# Altium PCB wheel.pcbdoc
Units mil, origin at the board's own origin, x right, y up, seen from the top; angles counter-clockwise.
Board outline 3149.6 x 3149.71 mil, 2 copper layers (Top Layer, Bottom Layer); 3 components, 1 nets, 0 pads, 0 vias.
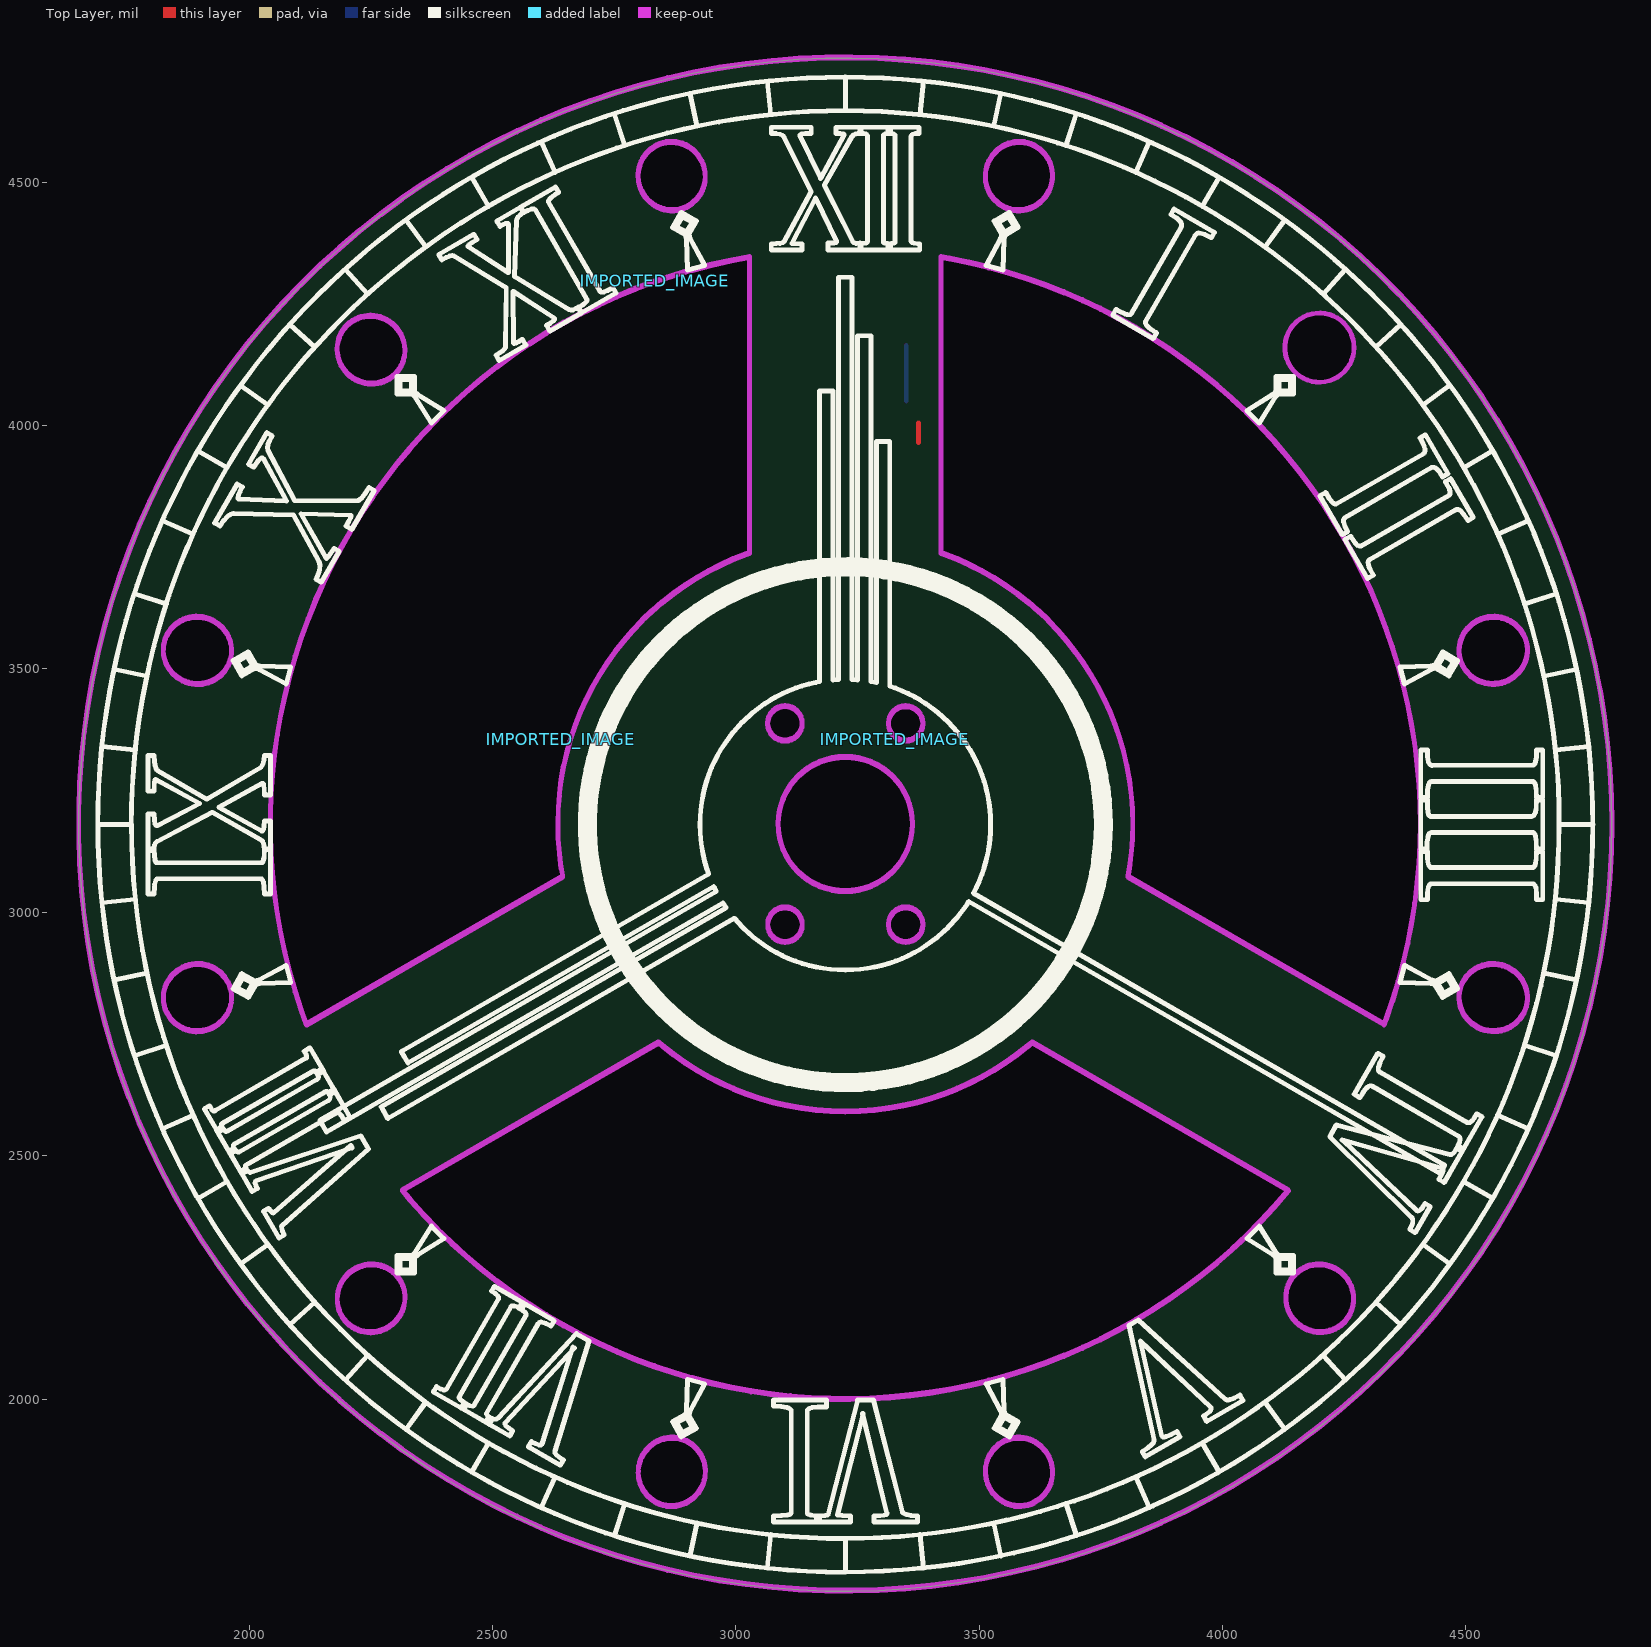
[diagram p0: Top Layer view]
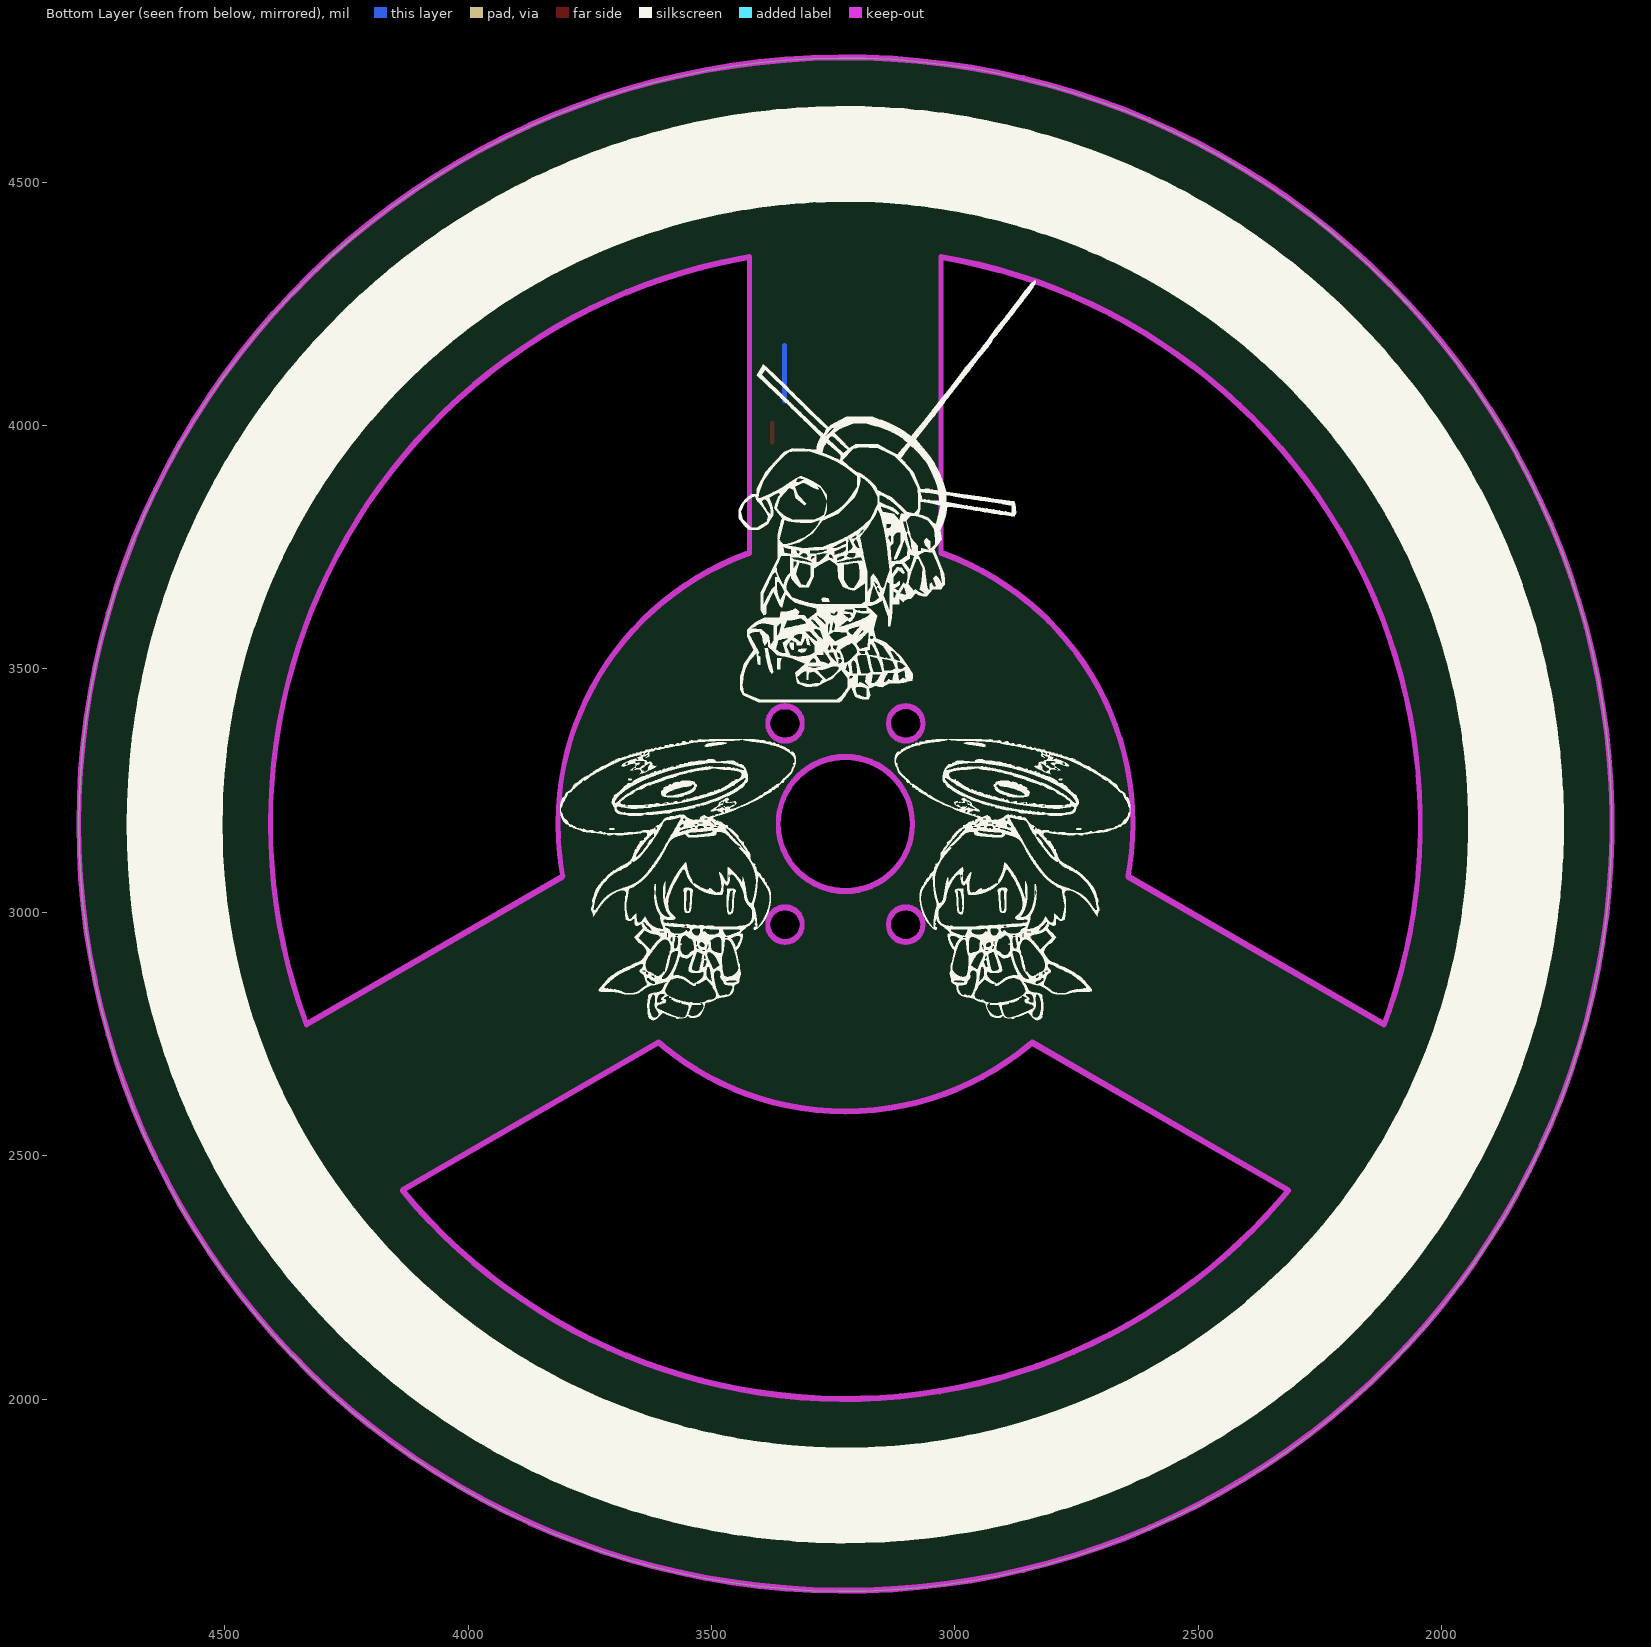
[diagram p1: Bottom Layer view, seen from below]

## Layer stack, top to bottom
Top Solder: solder mask 0.4, Solder Resist, Dk 3.5
Top Layer: signal copper 1.4
Dielectric1: dielectric 12.6, FR-4, Dk 4.8
Bottom Layer: signal copper 1.4
Bottom Solder: solder mask 0.4, Solder Resist, Dk 3.5

## Board outline
1931.74,2281.02 1901.32,2326.44 1872.49,2372.89 1845.3,2420.31 1819.76,2468.65 1795.92,2517.84 1773.8,2567.83 1753.42,2618.56 1734.83,2669.97 1718.03,2722 1703.04,2774.57 1689.88,2827.63 1678.58,2881.12 1669.14,2934.97 1661.57,2989.11 1655.89,3043.48 1652.1,3098.02 1650.2,3152.65 1650.2,3207.32 1652.1,3261.96 1655.89,3316.5 1661.57,3370.87 1669.14,3425.01 1678.58,3478.86 1689.88,3532.34 1703.04,3585.41 1718.03,3637.98 1734.83,3690.01 1753.42,3741.41 1773.79,3792.14 1795.92,3842.14 1819.76,3891.33 1845.29,3939.67 1872.49,3987.09 1901.32,4033.55 1931.74,4078.97 1963.72,4123.31 1997.21,4166.51 2032.19,4208.52 2068.61,4249.3 2106.42,4288.78 2145.58,4326.94 2186.03,4363.7 2227.74,4399.05 2270.65,4432.92 2314.71,4465.28 2359.87,4496.1 2406.06,4525.32 2453.25,4552.93 2501.36,4578.89 2550.35,4603.15 2600.15,4625.71 2650.71,4646.52 2701.95,4665.56 2753.82,4682.82 2806.26,4698.26 2859.21,4711.88 2912.6,4723.65 2966.36,4733.55 3020.44,4741.59 3074.76,4747.74 3129.26,4752.01 3183.88,4754.38 3238.55,4754.85 3293.2,4753.43 3347.76,4750.11 3402.18,4744.9 3456.39,4737.81 3510.32,4728.83 3563.9,4718 3617.07,4705.3 3669.78,4690.77 3721.94,4674.42 3773.51,4656.27 3824.41,4636.34 3874.6,4614.65 3924,4591.24 3972.56,4566.12 4020.22,4539.34 4066.91,4510.92 4112.6,4480.89 4157.21,4449.3 4200.71,4416.17 4243.03,4381.56 4284.11,4345.5 4323.93,4308.04 4362.42,4269.22 4399.53,4229.07 4435.23,4187.68 4469.47,4145.06 4502.22,4101.28 4533.43,4056.4 4563.06,4010.45 4591.07,3963.51 4617.45,3915.62 4642.13,3866.85 4665.12,3817.25 4686.37,3766.87 4705.86,3715.8 4723.56,3664.07 4739.46,3611.77 4753.53,3558.94 4765.77,3505.66 4776.14,3451.99 4784.64,3397.98 4791.27,3343.72 4796.01,3289.25 4798.86,3234.66 4799.8,3180 4798.86,3125.34 4796.01,3070.74 4791.27,3016.28 4784.64,2962.01 4776.14,2908.01 4765.76,2854.34 4753.53,2801.05 4739.46,2748.23 4723.56,2695.92 4705.86,2644.2 4686.37,2593.12 4665.12,2542.75 4642.14,2493.15 4617.45,2444.38 4591.07,2396.49 4563.06,2349.55 4533.43,2303.61 4502.23,2258.72 4469.48,2214.94 4435.24,2172.33 4399.54,2130.93 4362.42,2090.79 4323.93,2051.97 4284.12,2014.5 4243.03,1978.44 4200.71,1943.83 4157.22,1910.71 4112.61,1879.12 4066.92,1849.09 4020.22,1820.67 3972.57,1793.88 3924.01,1768.77 3874.61,1745.35 3824.42,1723.67 3773.52,1703.74 3721.95,1685.59 3669.78,1669.24 3617.08,1654.7 3563.91,1642.01 3510.32,1631.17 3456.4,1622.2 3402.19,1615.1 3347.77,1609.89 3293.2,1606.57 3238.55,1605.15 3183.89,1605.62 3129.27,1607.99 3074.77,1612.26 3020.44,1618.41 2966.37,1626.45 2912.61,1636.36 2859.22,1648.12 2806.27,1661.74 2753.83,1677.18 2701.96,1694.43 2650.72,1713.48 2600.16,1734.29 2550.36,1756.84 2501.37,1781.11 2453.26,1807.06 2406.07,1834.67 2359.87,1863.9 2314.72,1894.71 2270.66,1927.08 2227.75,1960.95 2186.04,1996.29 2145.58,2033.06 2106.42,2071.21 2068.61,2110.7 2032.2,2151.47 1997.22,2193.48 1963.72,2236.68
cut-out: 4127.87,4160 ccw(c4198.94,4160) 4198.94,4088.94 ccw(c4198.94,4160) 4270,4160 ccw(c4198.94,4160) 4198.94,4231.06 ccw(c4198.94,4160)
cut-out: 2682.24,2130.83 2718.98,2112.62 2756.33,2095.71 2794.24,2080.11 2832.67,2065.82 2871.58,2052.88 2910.92,2041.3 2950.62,2031.09 2990.66,2022.27 3030.99,2014.84 3071.54,2008.81 3112.28,2004.19 3153.16,2001 3194.12,1999.22 3235.12,1998.86 3276.11,1999.93 3317.03,2002.42 3357.85,2006.32 3398.51,2011.65 3438.95,2018.38 3479.14,2026.51 3519.02,2036.03 3558.55,2046.92 3597.67,2059.19 3636.34,2072.8 3674.53,2087.75 3712.16,2104.01 3749.21,2121.57 3785.64,2140.41 3821.38,2160.49 3856.4,2181.81 3890.66,2204.33 3924.13,2228.03 3956.74,2252.87 3988.48,2278.82 4019.3,2305.87 4049.16,2333.97 4078.02,2363.09 4105.86,2393.19 4135.08,2427.28 3608.52,2731.28 3600.49,2724.32 3578.23,2706.83 3555.06,2690.32 3531.07,2674.95 3506.33,2660.83 3480.93,2647.76 3454.7,2635.97 3427.87,2625.32 3400.45,2616.03 3372.46,2608.1 3343.89,2601.53 3314.87,2596.34 3285.27,2592.52 3255.24,2590.31 3224.91,2589.53 3194.57,2590.34 3164.5,2592.58 3134.96,2596.34 3105.9,2601.52 3077.33,2608.13 3049.32,2616.12 3021.83,2625.4 2995.08,2635.95 2968.85,2647.8 2943.39,2660.79 2918.67,2675.07 2894.68,2690.4 2871.55,2706.82 2849.27,2724.34 2841.38,2731.2 2314.86,2427.2 2330.36,2408.59 2357.67,2378.01 2386.03,2348.4 2415.39,2319.78 2445.74,2292.21 2477.02,2265.7 2509.2,2240.3 2542.25,2216.03 2576.12,2192.92 2610.76,2171 2646.15,2150.29
cut-out: 3744.13,3461.5 3729.87,3486.21 3714.51,3510.2 3698.08,3533.32 3680.5,3555.63 3662,3577.11 3642.46,3597.59 3621.93,3617.17 3600.47,3635.71 3578.2,3653.22 3555.06,3669.65 3531.12,3685.06 3506.34,3699.25 3480.89,3712.24 3454.79,3724.13 3427.91,3734.65 3421.85,3736.72 3421.85,4344.47 3438.95,4341.62 3479.13,4333.49 3519.01,4323.97 3558.54,4313.07 3597.66,4300.81 3636.34,4287.19 3674.52,4272.25 3712.16,4255.99 3749.21,4238.42 3785.63,4219.59 3821.37,4199.5 3856.39,4178.18 3890.66,4155.66 3924.12,4131.97 3956.73,4107.13 3988.48,4081.17 4019.29,4054.12 4049.15,4026.02 4078.02,3996.91 4105.85,3966.8 4132.63,3935.75 4158.31,3903.79 4182.88,3870.96 4206.28,3837.3 4228.5,3802.84 4249.51,3767.63 4269.29,3731.71 4287.8,3695.13 4305.04,3657.93 4320.99,3620.15 4335.6,3581.84 4348.88,3543.05 4360.8,3503.82 4371.36,3464.2 4380.53,3424.24 4388.31,3383.99 4394.69,3343.48 4399.66,3302.78 4403.21,3261.94 4405.34,3220.99 4406.06,3179.99 4405.35,3139 4403.21,3098.05 4399.66,3057.2 4394.69,3016.51 4388.31,2976.01 4380.53,2935.75 4371.36,2895.79 4360.8,2856.17 4348.88,2816.94 4335.6,2778.15 4331.84,2768.28 3805.41,3072.21 3808.62,3090.13 3812.38,3119.67 3814.66,3149.6 3815.38,3179.99 3814.65,3210.41 3812.3,3240.41 3808.57,3269.96 3803.38,3298.98 3796.81,3327.55 3788.79,3355.59 3779.55,3383.09 3768.99,3409.87 3757.15,3436.02
cut-out: 2045.28,3118.51 2043.86,3159.49 2043.86,3200.49 2045.28,3241.47 2048.12,3282.37 2052.39,3323.15 2058.06,3363.76 2065.14,3404.14 2073.62,3444.26 2083.48,3484.05 2094.72,3523.48 2107.32,3562.5 2121.28,3601.06 2136.55,3639.11 2153.14,3676.6 2171.03,3713.5 2190.18,3749.75 2210.58,3785.32 2232.2,3820.15 2255.01,3854.22 2278.99,3887.48 2304.12,3919.88 2330.35,3951.39 2357.66,3981.97 2386.02,4011.59 2415.39,4040.2 2445.73,4067.77 2477.01,4094.28 2509.2,4119.69 2542.24,4143.96 2576.11,4167.07 2610.76,4188.99 2646.15,4209.69 2682.23,4229.16 2718.97,4247.36 2756.33,4264.28 2794.24,4279.89 2832.67,4294.17 2871.57,4307.11 2910.91,4318.69 2950.62,4328.9 2990.66,4337.73 3028.15,4344.64 3028.15,3736.91 3021.79,3734.77 2994.96,3724.12 2968.8,3712.29 2943.33,3699.26 2918.66,3685.09 2894.68,3669.73 2871.51,3653.22 2849.25,3635.72 2827.85,3617.17 2807.23,3597.59 2787.79,3577.11 2769.17,3555.69 2751.65,3533.42 2735.18,3510.19 2719.85,3486.2 2705.62,3461.57 2692.58,3436.02 2680.78,3409.88 2670.18,3383.04 2660.95,3355.64 2652.96,3327.63 2646.35,3299.06 2641.17,3270 2637.41,3240.46 2635.21,3210.48 2634.36,3180.06 2635.09,3149.63 2637.43,3119.63 2641.17,3090.09 2644.39,3072.06 2117.95,2768.12 2107.33,2797.48 2094.73,2836.49 2083.48,2875.93 2073.62,2915.72 2065.14,2955.84 2058.06,2996.22 2052.39,3036.83 2048.12,3077.61
cut-out: 3518.67,4481.65 3516.21,4487.85 3514.44,4494.35 3513.16,4501.04 3512.57,4507.93 3512.77,4514.82 3513.56,4521.9 3515.03,4528.89 3517.2,4535.78 3520.05,4542.18 3527.34,4553.89 3536.59,4563.83 3547.41,4571.71 3553.32,4574.86 3559.52,4577.32 3565.92,4579.29 3572.41,4580.57 3579.2,4581.26 3586,4581.16 3592.89,4580.47 3599.78,4578.99 3606.47,4576.83 3612.87,4573.97 3624.28,4566.69 3633.93,4557.44 3641.51,4546.51 3644.56,4540.51 3647.02,4534.31 3648.79,4527.81 3649.97,4521.12 3650.57,4514.23 3650.46,4507.34 3649.68,4500.25 3648.1,4493.26 3645.94,4486.37 3643.09,4479.98 3635.8,4468.26 3626.55,4458.32 3615.72,4450.45 3609.91,4447.3 3603.72,4444.84 3597.31,4442.87 3590.72,4441.59 3584.03,4440.9 3577.14,4441 3570.25,4441.69 3563.36,4443.16 3556.66,4445.33 3550.37,4448.18 3538.95,4455.47 3529.3,4464.72 3521.63,4475.65
cut-out: 2803.91,4486.37 2801.75,4493.26 2800.27,4500.25 2799.48,4507.34 2799.28,4514.23 2799.88,4521.12 2801.16,4527.81 2802.93,4534.31 2805.39,4540.51 2808.34,4546.51 2816.02,4557.44 2825.66,4566.69 2837.08,4573.97 2843.38,4576.83 2850.07,4578.99 2856.96,4580.47 2863.85,4581.16 2870.74,4581.26 2877.43,4580.57 2884.03,4579.29 2890.43,4577.32 2896.63,4574.86 2902.43,4571.71 2913.26,4563.83 2922.51,4553.89 2929.8,4542.18 2932.65,4535.78 2934.82,4528.89 2936.29,4521.9 2937.08,4514.82 2937.28,4507.93 2936.69,4501.04 2935.41,4494.35 2933.64,4487.85 2931.17,4481.65 2928.22,4475.65 2920.54,4464.72 2910.9,4455.47 2899.48,4448.18 2893.18,4445.33 2886.49,4443.16 2879.6,4441.69 2872.71,4441 2865.92,4440.9 2859.13,4441.59 2852.63,4442.87 2846.23,4444.84 2840.03,4447.3 2834.13,4450.45 2823.3,4458.32 2814.05,4468.26 2806.76,4479.98
cut-out: 2192.89,4116.69 2189.25,4122.6 2186.39,4128.79 2184.13,4135.19 2182.45,4141.79 2181.37,4148.38 2180.98,4155.07 2181.27,4161.77 2182.16,4168.36 2183.64,4174.86 2185.8,4181.16 2188.66,4187.36 2192.1,4193.26 2196.14,4198.87 2200.86,4204.09 2206.08,4208.81 2211.69,4212.85 2217.59,4216.29 2223.79,4219.15 2230.09,4221.31 2236.59,4222.79 2243.18,4223.68 2249.88,4223.97 2256.57,4223.58 2263.16,4222.59 2269.76,4220.92 2276.16,4218.66 2282.36,4215.7 2288.26,4212.16 2293.97,4207.93 2299.28,4203.1 2304.11,4197.79 2308.34,4192.08 2311.88,4186.18 2314.84,4179.88 2317.1,4173.48 2318.77,4166.98 2319.76,4160.39 2320.15,4153.7 2319.95,4147 2319.07,4140.41 2317.49,4133.91 2315.33,4127.52 2312.57,4121.41 2309.13,4115.51 2304.99,4109.9 2300.27,4104.68 2295.05,4099.96 2289.44,4095.82 2283.53,4092.38 2277.43,4089.62 2271.03,4087.46 2264.54,4085.88 2257.95,4084.99 2251.25,4084.8 2244.56,4085.19 2237.97,4086.18 2231.47,4087.85 2225.07,4090.11 2218.77,4093.07 2212.87,4096.61 2207.16,4100.84 2201.84,4105.66 2197.02,4110.98
cut-out: 1830.19,3508.32 1827.73,3514.52 1825.76,3520.92 1824.48,3527.42 1823.79,3534.21 1823.89,3541 1824.58,3547.89 1826.06,3554.78 1828.22,3561.47 1831.08,3567.87 1838.36,3579.29 1847.61,3588.93 1858.54,3596.61 1864.54,3599.56 1870.74,3602.02 1877.24,3603.79 1883.93,3605.07 1890.82,3605.66 1897.71,3605.47 1904.8,3604.68 1911.79,3603.2 1918.67,3600.94 1925.07,3598.18 1936.79,3590.8 1946.73,3581.65 1954.6,3570.82 1957.75,3564.92 1960.21,3558.72 1962.18,3552.32 1963.46,3545.72 1964.15,3539.03 1964.05,3532.24 1963.36,3525.35 1961.88,3518.46 1959.72,3511.77 1956.86,3505.37 1949.58,3493.95 1940.33,3484.31 1929.4,3476.73 1923.4,3473.68 1917.2,3471.22 1910.7,3469.44 1904.01,3468.16 1897.12,3467.57 1890.23,3467.77 1883.14,3468.56 1876.15,3470.03 1869.27,3472.2 1862.87,3475.05 1851.15,3482.34 1841.21,3491.59 1833.34,3502.42
cut-out: 1828.32,2798.48 1826.15,2805.17 1824.68,2812.06 1823.89,2818.95 1823.89,2825.74 1824.58,2832.44 1825.86,2839.03 1827.73,2845.43 1830.29,2851.63 1833.44,2857.53 1841.21,2868.36 1851.15,2877.51 1862.87,2884.9 1869.27,2887.65 1876.15,2889.92 1883.14,2891.39 1890.23,2892.18 1897.12,2892.38 1904.01,2891.79 1910.7,2890.51 1917.2,2888.74 1923.4,2886.27 1929.4,2883.32 1940.33,2875.64 1949.68,2866 1956.96,2854.58 1959.82,2848.18 1961.98,2841.49 1963.46,2834.6 1964.15,2827.71 1964.25,2820.92 1963.56,2814.13 1962.28,2807.63 1960.31,2801.24 1957.85,2795.03 1954.7,2789.13 1946.82,2778.3 1936.88,2769.05 1925.17,2761.77 1918.77,2758.91 1911.88,2756.75 1904.89,2755.27 1897.81,2754.48 1890.92,2754.29 1884.03,2754.88 1877.33,2756.16 1870.84,2757.93 1864.64,2760.39 1858.63,2763.44 1847.71,2771.02 1838.46,2780.66 1831.17,2792.08
cut-out: 2192.2,2166.69 2188.75,2172.59 2185.9,2178.79 2183.73,2185.09 2182.26,2191.59 2181.37,2198.18 2181.17,2204.88 2181.47,2211.57 2182.55,2218.16 2184.23,2224.76 2186.49,2231.16 2189.44,2237.36 2192.99,2243.26 2197.22,2248.97 2202.04,2254.29 2207.36,2259.11 2213.06,2263.34 2218.97,2266.89 2225.17,2269.84 2231.57,2272.1 2238.06,2273.77 2244.76,2274.86 2251.45,2275.25 2258.04,2274.96 2264.64,2274.07 2271.23,2272.59 2277.53,2270.43 2283.73,2267.57 2289.64,2264.13 2295.25,2260.09 2300.46,2255.37 2305.19,2250.15 2309.23,2244.54 2312.67,2238.64 2315.53,2232.44 2317.69,2226.14 2319.16,2219.54 2320.05,2212.95 2320.35,2206.26 2319.95,2199.66 2318.87,2192.97 2317.2,2186.47 2314.93,2180.07 2311.98,2173.87 2308.44,2167.87 2304.2,2162.16 2299.38,2156.85 2294.07,2152.02 2288.36,2147.89 2282.45,2144.25 2276.25,2141.39 2269.86,2139.13 2263.36,2137.46 2256.66,2136.37 2250.07,2135.98 2243.38,2136.27 2236.78,2137.16 2230.19,2138.64 2223.89,2140.8 2217.69,2143.66 2211.78,2147.1 2206.17,2151.14 2200.96,2155.86 2196.23,2161.08
cut-out: 2805.58,1819.64 2803.12,1825.84 2801.35,1832.34 2800.07,1839.03 2799.48,1845.92 2799.68,1852.81 2800.46,1859.9 2801.94,1866.88 2804.11,1873.77 2806.96,1880.17 2814.25,1891.88 2823.5,1901.83 2834.23,1909.6 2840.13,1912.75 2846.33,1915.31 2852.73,1917.18 2859.32,1918.46 2866.02,1919.15 2872.91,1919.15 2879.8,1918.36 2886.69,1916.88 2893.38,1914.72 2899.68,1911.87 2911.1,1904.58 2920.74,1895.33 2928.42,1884.4 2931.37,1878.4 2933.83,1872.2 2935.6,1865.7 2936.88,1859.01 2937.47,1852.12 2937.28,1845.23 2936.49,1838.14 2935.01,1831.16 2932.85,1824.27 2929.99,1817.87 2922.71,1806.16 2913.46,1796.22 2902.63,1788.34 2896.73,1785.19 2890.53,1782.73 2884.13,1780.76 2877.63,1779.48 2870.84,1778.79 2864.05,1778.89 2857.16,1779.58 2850.27,1781.06 2843.57,1783.22 2837.28,1786.08 2825.86,1793.36 2816.21,1802.71 2808.53,1813.64
cut-out: 3517.39,1824.37 3515.23,1831.26 3513.75,1838.24 3512.87,1845.33 3512.77,1852.22 3513.36,1859.11 3514.54,1865.8 3516.41,1872.3 3518.87,1878.5 3521.82,1884.5 3529.4,1895.43 3539.05,1904.68 3550.46,1911.96 3556.86,1914.82 3563.56,1916.98 3570.45,1918.46 3577.33,1919.15 3584.13,1919.25 3590.92,1918.56 3597.41,1917.28 3603.81,1915.31 3610.01,1912.85 3615.92,1909.7 3626.74,1901.83 3636,1891.88 3643.28,1880.17 3646.13,1873.77 3648.3,1866.88 3649.78,1859.9 3650.57,1852.81 3650.76,1845.92 3650.17,1839.03 3648.89,1832.34 3647.12,1825.84 3644.66,1819.64 3641.7,1813.64 3634.03,1802.71 3624.39,1793.46 3612.96,1786.18 3606.66,1783.32 3599.97,1781.15 3593.09,1779.68 3586.2,1778.99 3579.3,1778.89 3572.61,1779.58 3566.02,1780.86 3559.62,1782.83 3553.42,1785.29 3547.51,1788.44 3536.78,1796.31 3527.53,1806.26 3520.25,1817.97
cut-out: 4138.16,2173.97 4141.7,2168.07 4145.94,2162.36 4150.76,2157.04 4156.07,2152.22 4161.78,2147.99 4167.69,2144.44 4173.89,2141.49 4180.29,2139.23 4186.88,2137.55 4193.48,2136.57 4200.17,2136.18 4206.86,2136.37 4213.46,2137.26 4219.96,2138.83 4226.25,2141 4232.45,2143.76 4238.36,2147.2 4243.97,2151.33 4249.19,2156.06 4253.91,2161.27 4257.94,2166.89 4261.39,2172.79 4264.24,2178.89 4266.41,2185.29 4267.89,2191.79 4268.77,2198.38 4269.07,2205.07 4268.67,2211.77 4267.69,2218.36 4266.02,2224.86 4263.76,2231.26 4260.8,2237.55 4257.26,2243.46 4253.02,2249.17 4248.2,2254.48 4242.89,2259.31 4237.18,2263.44 4231.27,2267.08 4224.97,2269.94 4218.57,2272.2 4212.08,2273.87 4205.48,2274.96 4198.79,2275.35 4192.1,2275.05 4185.5,2274.17 4179.01,2272.69 4172.61,2270.53 4166.51,2267.67 4160.6,2264.23 4154.99,2260.19 4149.77,2255.47 4145.05,2250.25 4140.92,2244.64 4137.47,2238.74 4134.72,2232.53 4132.55,2226.24 4130.98,2219.74 4130.09,2213.14 4129.89,2206.45 4130.29,2199.76 4131.27,2193.16 4132.94,2186.57 4135.21,2180.17
cut-out: 4492.3,2795.13 4489.83,2801.33 4487.87,2807.73 4486.59,2814.33 4485.9,2821.02 4486,2827.91 4486.69,2834.8 4488.16,2841.69 4490.33,2848.38 4493.18,2854.68 4500.46,2866.1 4509.72,2875.74 4520.65,2883.42 4526.65,2886.37 4532.85,2888.83 4539.35,2890.61 4546.03,2891.89 4552.93,2892.48 4559.81,2892.28 4566.9,2891.49 4573.89,2890.01 4580.78,2887.85 4587.18,2884.99 4598.89,2877.71 4608.83,2868.46 4616.7,2857.63 4619.85,2851.73 4622.31,2845.53 4624.28,2839.13 4625.57,2832.63 4626.26,2825.84 4626.15,2819.05 4625.46,2812.16 4623.99,2805.27 4621.82,2798.58 4618.97,2792.28 4611.69,2780.86 4602.43,2771.22 4591.51,2763.54 4585.5,2760.59 4579.3,2758.12 4572.81,2756.35 4566.11,2755.07 4559.22,2754.48 4552.33,2754.68 4545.25,2755.47 4538.26,2756.94 4531.37,2759.11 4524.97,2761.96 4513.26,2769.25 4503.32,2778.5 4495.44,2789.23
cut-out: 4490.23,3511.86 4488.07,3518.56 4486.59,3525.45 4485.9,3532.34 4485.8,3539.13 4486.49,3545.92 4487.77,3552.42 4489.74,3558.81 4492.2,3565.01 4495.35,3570.92 4503.22,3581.75 4513.16,3591 4524.87,3598.28 4531.27,3601.14 4538.16,3603.3 4545.15,3604.78 4552.24,3605.57 4559.13,3605.76 4566.02,3605.17 4572.71,3603.89 4579.2,3602.12 4585.4,3599.66 4591.41,3596.71 4602.33,3589.03 4611.59,3579.39 4618.87,3567.97 4621.72,3561.67 4623.89,3554.98 4625.37,3548.09 4626.15,3541.2 4626.15,3534.31 4625.46,3527.61 4624.19,3521.02 4622.31,3514.62 4619.76,3508.42 4616.61,3502.51 4608.83,3491.79 4598.89,3482.53 4587.18,3475.25 4580.78,3472.4 4573.89,3470.23 4566.9,3468.76 4559.81,3467.97 4552.93,3467.77 4546.03,3468.36 4539.35,3469.64 4532.85,3471.41 4526.55,3473.87 4520.65,3476.83 4509.62,3484.5 4500.37,3494.15 4493.09,3505.57
cut-out: 3518.67,4481.65 3516.21,4487.85 3514.44,4494.35 3513.16,4501.04 3512.57,4507.93 3512.77,4514.82 3513.56,4521.9 3515.03,4528.89 3517.2,4535.78 3520.05,4542.18 3527.34,4553.89 3536.59,4563.83 3547.41,4571.71 3553.32,4574.86 3559.52,4577.32 3565.92,4579.29 3572.41,4580.57 3579.2,4581.26 3586,4581.16 3592.89,4580.47 3599.78,4578.99 3606.47,4576.83 3612.87,4573.97 3624.28,4566.69 3633.93,4557.44 3641.51,4546.51 3644.56,4540.51 3647.02,4534.31 3648.79,4527.81 3649.97,4521.12 3650.57,4514.23 3650.46,4507.34 3649.68,4500.25 3648.1,4493.26 3645.94,4486.37 3643.09,4479.98 3635.8,4468.26 3626.55,4458.32 3615.72,4450.45 3609.91,4447.3 3603.72,4444.84 3597.31,4442.87 3590.72,4441.59 3584.03,4440.9 3577.14,4441 3570.25,4441.69 3563.36,4443.16 3556.66,4445.33 3550.37,4448.18 3538.95,4455.47 3529.3,4464.72 3521.63,4475.65
cut-out: 2803.91,4486.37 2801.75,4493.26 2800.27,4500.25 2799.48,4507.34 2799.28,4514.23 2799.88,4521.12 2801.16,4527.81 2802.93,4534.31 2805.39,4540.51 2808.34,4546.51 2816.02,4557.44 2825.66,4566.69 2837.08,4573.97 2843.38,4576.83 2850.07,4578.99 2856.96,4580.47 2863.85,4581.16 2870.74,4581.26 2877.43,4580.57 2884.03,4579.29 2890.43,4577.32 2896.63,4574.86 2902.43,4571.71 2913.26,4563.83 2922.51,4553.89 2929.8,4542.18 2932.65,4535.78 2934.82,4528.89 2936.29,4521.9 2937.08,4514.82 2937.28,4507.93 2936.69,4501.04 2935.41,4494.35 2933.64,4487.85 2931.17,4481.65 2928.22,4475.65 2920.54,4464.72 2910.9,4455.47 2899.48,4448.18 2893.18,4445.33 2886.49,4443.16 2879.6,4441.69 2872.71,4441 2865.92,4440.9 2859.13,4441.59 2852.63,4442.87 2846.23,4444.84 2840.03,4447.3 2834.13,4450.45 2823.3,4458.32 2814.05,4468.26 2806.76,4479.98
cut-out: 2803.91,4486.37 2801.75,4493.26 2800.27,4500.25 2799.48,4507.34 2799.28,4514.23 2799.88,4521.12 2801.16,4527.81 2802.93,4534.31 2805.39,4540.51 2808.34,4546.51 2816.02,4557.44 2825.66,4566.69 2837.08,4573.97 2843.38,4576.83 2850.07,4578.99 2856.96,4580.47 2863.85,4581.16 2870.74,4581.26 2877.43,4580.57 2884.03,4579.29 2890.43,4577.32 2896.63,4574.86 2902.43,4571.71 2913.26,4563.83 2922.51,4553.89 2929.8,4542.18 2932.65,4535.78 2934.82,4528.89 2936.29,4521.9 2937.08,4514.82 2937.28,4507.93 2936.69,4501.04 2935.41,4494.35 2933.64,4487.85 2931.17,4481.65 2928.22,4475.65 2920.54,4464.72 2910.9,4455.47 2899.48,4448.18 2893.18,4445.33 2886.49,4443.16 2879.6,4441.69 2872.71,4441 2865.92,4440.9 2859.13,4441.59 2852.63,4442.87 2846.23,4444.84 2840.03,4447.3 2834.13,4450.45 2823.3,4458.32 2814.05,4468.26 2806.76,4479.98
cut-out: 3110.58,3102.95 3103.69,3114.37 3097.89,3126.38 3093.26,3139.07 3089.82,3152.26 3087.75,3165.95 3087.06,3180.02 3087.75,3194.09 3089.82,3207.77 3093.26,3220.96 3097.89,3233.66 3103.69,3245.67 3110.58,3257.09 3118.56,3267.62 3127.42,3277.46 3137.26,3286.32 3147.79,3294.29 3159.21,3301.18 3171.21,3306.99 3183.91,3311.61 3197.1,3315.06 3210.78,3317.13 3224.85,3317.82 3238.93,3317.12 3252.61,3315.06 3265.9,3311.61 3278.5,3306.99 3290.6,3301.18 3301.92,3294.29 3312.55,3286.32 3322.39,3277.46 3331.25,3267.62 3339.23,3257.09 3346.12,3245.67 3351.92,3233.66 3356.55,3220.96 3359.99,3207.78 3362.06,3194.1 3362.75,3180.02 3362.06,3165.95 3359.99,3152.26 3356.55,3139.07 3351.92,3126.38 3346.12,3114.37 3339.23,3102.95 3331.26,3092.42 3322.39,3082.58 3312.55,3073.72 3301.92,3065.75 3290.6,3058.86 3278.5,3053.05 3265.9,3048.43 3252.61,3044.98 3238.93,3042.91 3224.86,3042.22 3210.78,3042.91 3197.1,3044.98 3183.91,3048.42 3171.21,3053.05 3159.21,3058.86 3147.79,3065.75 3137.26,3073.72 3127.42,3082.58 3118.56,3092.42
cut-out: 3319.55,2953.54 3316.29,2959.55 3314.23,2966.14 3313.53,2973.33 3314.23,2980.41 3316.29,2987.11 3319.54,2993.11 3323.87,2998.32 3329.19,3002.66 3335.19,3005.91 3341.78,3007.97 3348.97,3008.66 3356.16,3007.97 3362.75,3005.91 3368.76,3002.66 3374.07,2998.33 3378.4,2993.11 3381.65,2987.11 3383.71,2980.41 3384.4,2973.32 3383.71,2966.14 3381.65,2959.55 3378.4,2953.54 3374.07,2948.23 3368.75,2943.9 3362.75,2940.65 3356.16,2938.58 3348.97,2937.89 3341.78,2938.58 3335.19,2940.65 3329.19,2943.9 3323.87,2948.23
cut-out: 3319.44,3366.83 3316.19,3372.83 3314.13,3379.53 3313.43,3386.61 3314.13,3393.8 3316.19,3400.39 3319.44,3406.4 3323.77,3411.71 3329.08,3416.04 3335.09,3419.29 3341.69,3421.36 3348.87,3422.05 3356.05,3421.36 3362.65,3419.29 3368.66,3416.04 3373.97,3411.71 3378.3,3406.4 3381.55,3400.39 3383.62,3393.8 3384.3,3386.62 3383.62,3379.52 3381.55,3372.83 3378.3,3366.83 3373.97,3361.61 3368.66,3357.28 3362.65,3354.04 3356.06,3351.97 3348.87,3351.28 3341.68,3351.97 3335.09,3354.04 3329.09,3357.28 3323.77,3361.61
cut-out: 3081.05,3357.38 3087.16,3354.13 3093.75,3352.07 3100.94,3351.38 3108.12,3352.07 3114.72,3354.13 3120.72,3357.38 3126.03,3361.71 3130.37,3366.93 3133.61,3372.93 3135.68,3379.62 3136.37,3386.71 3135.68,3393.9 3133.62,3400.49 3130.36,3406.5 3126.03,3411.81 3120.72,3416.14 3114.72,3419.39 3108.12,3421.45 3100.93,3422.15 3093.75,3421.45 3087.16,3419.39 3081.06,3416.14 3075.84,3411.81 3071.51,3406.5 3068.16,3400.49 3066.1,3393.9 3065.41,3386.71 3066.1,3379.62 3068.16,3372.93 3071.51,3366.93 3075.84,3361.71
cut-out: 3066.29,2966.14 3065.61,2973.32 3066.29,2980.41 3068.36,2987.11 3071.61,2993.11 3075.94,2998.32 3081.26,3002.66 3087.26,3005.91 3093.85,3007.97 3101.04,3008.66 3108.22,3007.97 3114.82,3005.9 3120.82,3002.66 3126.13,2998.32 3130.46,2993.11 3133.71,2987.1 3135.78,2980.41 3136.47,2973.32 3135.78,2966.14 3133.72,2959.55 3130.46,2953.54 3126.14,2948.23 3120.82,2943.9 3114.82,2940.65 3108.22,2938.58 3101.03,2937.89 3093.85,2938.58 3087.26,2940.65 3081.25,2943.9 3075.94,2948.23 3071.61,2953.54 3068.36,2959.55
cut-out: 3066.29,2966.14 3065.61,2973.32 3066.29,2980.41 3068.36,2987.11 3071.61,2993.11 3075.94,2998.32 3081.26,3002.66 3087.26,3005.91 3093.85,3007.97 3101.04,3008.66 3108.22,3007.97 3114.82,3005.9 3120.82,3002.66 3126.13,2998.32 3130.46,2993.11 3133.71,2987.1 3135.78,2980.41 3136.47,2973.32 3135.78,2966.14 3133.72,2959.55 3130.46,2953.54 3126.14,2948.23 3120.82,2943.9 3114.82,2940.65 3108.22,2938.58 3101.03,2937.89 3093.85,2938.58 3087.26,2940.65 3081.25,2943.9 3075.94,2948.23 3071.61,2953.54 3068.36,2959.55

## Design rules (kind name [scope] priority, off if disabled: settings)
Clearance [All] p1: gap=10 ignorepadtopadclearanceinfootprint=FALSE except(0: Arc-Hole Track-Hole SMDPad-Hole THPad-Hole Via-Hole Fill-Hole Poly-Hole Region-Hole Text-Hole)
PolygonConnect [All] p1: connectstyle=Relief reliefconductorwidth=10 reliefentries=4 polygonreliefangle="90 Angle" airgapwidth=10
RoutingVias [All] p1: holewidth=28 width=50 viastyle="Through Hole" minholewidth=28 minwidth=50 maxholewidth=28 maxwidth=50
SolderMaskExpansion [All] p1: expansion=4 istentingtop=FALSE
Width [All] p1: maxlimit=10 minlimit=10 preferedwidth=10
30 further rules are at their usual default settings.

## Components (designator, comment, footprint, x,y, rotation, side; value= is the part's Value field where it differs from the comment)
IMPORTED_IMAGE "Comment" IMPORTED_IMAGE 3326.71,3355.88 r0 top
IMPORTED_IMAGE "Comment" IMPORTED_IMAGE 2833.3,4297.78 r0 top
IMPORTED_IMAGE "Comment" IMPORTED_IMAGE 2640.07,3355.88 r0 top

## Footprints (in the part's own frame and the unit in brackets; to place one, negate y for a bottom-side part, rotate by r counter-clockwise, add the part's x,y. Pads: shape width x height; smd on the part's side, far side on the other; paste and mask are expansions set on the pad)
IMPORTED_IMAGE [mil]

## Nets (pads, with @x,y where several pads share a name; then routed paths per layer and width w, separated by ;. In a path a pad name is that pad's centre, name@x,y a point inside that pad or via, vN(x,y) a via of type N, cw(c..) or ccw(c..) an arc to the next point about the centre after c; other vN are vias at no path point)
GND:  | length 155
  Top Layer w10: 3375,3965 3375,4005
  Bottom Layer w10: 3350,4050 3350,4165

## Keep-outs
Keep-Out Layer:
  drawing of 2463 lines, arcs and shapes, not listed

## Silkscreen, mask and mechanical layers (free items; w line width, h text height)
Top Overlay:
  drawing of 1738 lines, arcs and shapes, not listed
Bottom Overlay:
  circle w196.85: c3225,3180 r1377.95
Document:
  lines w0.1: 3299,3209 3301,3211